# EAGLE board ESP32_LoRa PCBready (EAGLE 9.6.2)
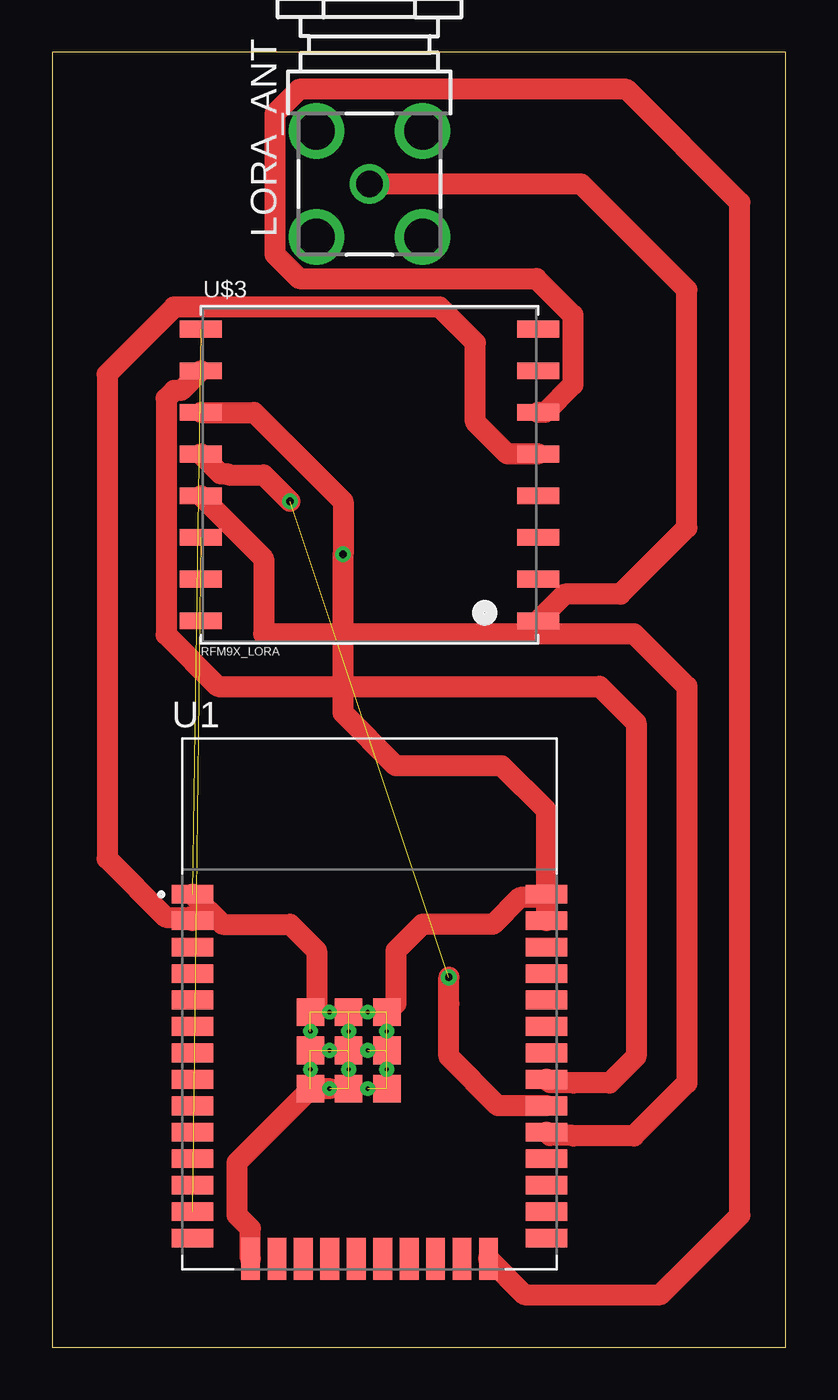
[diagram p0: board, top side]

Size 35.23 x 62.22 mm. Coordinates in mm from the lower left corner, seen from the top.
Outline: 0,0 35.23,0 35.23,62.22 0,62.22 0,0
Copper layers (1*16): Top 0.035mm / dielectric 1.5mm / Bottom 0.035mm
Design rules "default": minimum track width 6mil, minimum drill 0.35mm, track to track 6mil, track to pad 6mil, pad to pad 6mil, via to via 6mil, smd to smd 6mil, copper to edge 40mil, drill to drill 6mil, minimum pad ring 10mil, minimum via ring 8mil, stop-mask expansion 4mil, vias tented up to drill 0mil, thermal gap 10mil

## Footprints (pad centres in the part's own frame; a part is rotated, then mirrored left to right if it is on the bottom)
BU-SMA-G = drill 1.27: 1 0,0 | drill 1.778: 2 -2.55,2.55; 3 2.55,2.55; 4 2.55,-2.55; 5 -2.55,-2.55
MODULE_ESP32-WROOM-32 = smd 2 x 0.9: 1 -8.5,5.26; 2 -8.5,3.99; 3 -8.5,2.72; 4 -8.5,1.45; 5 -8.5,0.18; 6 -8.5,-1.09; 7 -8.5,-2.36; 8 -8.5,-3.63; 9 -8.5,-4.9; 10 -8.5,-6.17; 11 -8.5,-7.44; 12 -8.5,-8.71; 13 -8.5,-9.98; 14 -8.5,-11.25; 25 8.5,-11.25; 26 8.5,-9.98; 27 8.5,-8.71; 28 8.5,-7.44; 29 8.5,-6.17; 30 8.5,-4.9; 31 8.5,-3.63; 32 8.5,-2.36; 33 8.5,-1.09; 34 8.5,0.18; 35 8.5,1.45; 36 8.5,2.72; 37 8.5,3.99; 38 8.5,5.26 | smd 0.9 x 2: 15 -5.715,-12.25; 16 -4.445,-12.25; 17 -3.175,-12.25; 18 -1.905,-12.25; 19 -0.635,-12.25; 20 0.635,-12.25; 21 1.905,-12.25; 22 3.175,-12.25; 23 4.445,-12.25; 24 5.715,-12.25 | smd 1.33 x 1.33: 39_1 -2.835,-0.405; 39_2 -1,-0.405; 39_3 0.835,-0.405; 39_4 -2.835,-2.24; 39_5 -1,-2.24; 39_6 0.835,-2.24; 39_7 -2.835,-4.075; 39_8 -1,-4.075; 39_9 0.835,-4.075 | drill 0.2 pad 0.3: 39_10 -1.917,-0.405; 39_11 -0.083,-0.405; 39_12 -2.835,-1.323; 39_13 -1,-1.323; 39_14 0.835,-1.323; 39_15 -1.917,-2.24; 39_16 -0.083,-2.24; 39_17 -2.835,-3.158; 39_18 -1,-3.158; 39_19 0.835,-3.158; 39_20 -1.917,-4.075; 39_21 -0.083,-4.075
RFM9X_SMT = smd 2 x 0.8: 1P 8.1,-7; 2P 8.1,-5; 3P 8.1,-3; 4P 8.1,-1; 5P 8.1,1; 6P 8.1,3; 7P 8.1,5; 8P 8.1,7; 9P -8.1,7; 10P -8.1,5; 11P -8.1,3; 12P -8.1,1; 13P -8.1,-1; 14P -8.1,-3; 15P -8.1,-5; 16P -8.1,-7

## Placement (x,y rotation side)
LORA_ANT  BU-SMA-G  [BU-SMA-G]  15.24,55.88 90 top
U1  ESP32-WROOM-32  [MODULE_ESP32-WROOM-32]  15.24,16.51 0 top
U$3  RFM9X_LORA  [RFM9X_SMT]  15.24,41.91 0 top

## Library data of the parts
LORA_ANT = con-coax; OC_FARNELL: unknown; OC_NEWARK: unknown
U1 = ESP32-WROOM-32; AVAILABILITY: In Stock; DESCRIPTION: Bluetooth, WiFi 802.11b/g/n, Bluetooth v4.2 +EDR, Class 1, 2 and 3 Transceiver Module 2.4GHz ~ 2.5GHz Antenna Not Included, U.FL Surface Mount; MF: Espressif Systems; MP: ESP32-WROOM-32; PACKAGE: Module Espressif Systems; PRICE: None; PURCHASE-URL: https://pricing.snapeda.com/search/part/ESP32-WROOM-32/?ref=eda
U$3 = altro

## Nets
N$9: U1.2 U$3.5P
N$11: LORA_ANT.1 U$3.1P
N$13: U1.1 U1.15 U1.38 U1.39_1 U1.39_2 U1.39_3 U1.39_4 U1.39_5 U1.39_6 U1.39_7 U1.39_8 U1.39_9 U1.39_10 U1.39_11 U1.39_12 U1.39_13 U1.39_14 U1.39_15 U1.39_16 U1.39_17 U1.39_18 U1.39_19 U1.39_20 U1.39_21 U$3.9P
N$14: U1.24 U$3.6P
N$15: U1.13 U$3.14P
N$16: U1.29 U$3.13P
N$17: U1.30 U$3.12P
N$18: U1.37 U$3.11P
N$19: U1.31 U$3.10P

## Tracks (layer width: path | path; a pad name or v marks a point on that pad's centre or on a via)
N$9
  Top 1.016: U1.2 6.58,20.66 5.47,20.66 2.64,23.48 2.64,46.75 5.87,49.97 18.61,49.97 20.32,48.26 20.32,44.45 21.86,42.91 U$3.5P
N$11
  Top 1.016: U$3.1P 24.61,36.18 27.29,36.18 30.48,39.37 30.48,50.8 25.4,55.88 LORA_ANT.1
N$13  (21 unrouted)
  Top 1.016: U1.15 9.52,5.71 8.89,6.35 8.89,8.89 12.43,12.43 U1.39_20 | U1.1 8.19,20.32 11.43,20.32 12.7,19.05 12.7,16.4 U1.39_1 | U1.38 23.58,21.61 22.47,21.61 21.18,20.32 17.78,20.32 16.51,19.05 16.51,16.51 16.1,16.11 U1.39_3
N$14
  Top 1.016: U1.24 22.67,2.54 29.21,2.54 33.02,6.35 33.02,54.99 27.59,60.42 11.86,60.42 10.7,59.26 10.7,52.5 11.86,51.34 23.25,51.34 25,49.58 25,46.24 23.67,44.91 U$3.6P
N$15  (1 unrouted)
N$16
  Top 1.016: U$3.13P 10.16,37.89 10.16,34.29 27.94,34.29 30.48,31.75 30.48,12.7 27.94,10.16 25.03,10.16 25.01,10.18 23.9,10.18 U1.29
N$17  (via drill 0.35)  (1 unrouted)
  Top 1.016: U1.30 21.41,11.61 19.05,13.97 19.05,16.51 v19.05,17.78 | U$3.12P 8.08,41.97 8.41,41.97 8.47,41.91 10.16,41.91 v11.43,40.64
N$18  (via drill 0.35)
  Top 1.016: U$3.11P 9.7,44.91 13.97,40.64 v13.97,38.1 13.97,30.48 16.51,27.94 21.59,27.94 23.74,25.79 U1.37
N$19
  Top 1.016: U$3.10P 6.2,45.97 5.87,45.97 5.48,45.58 5.48,34.24 7.97,31.75 26.29,31.75 28.04,30 28.04,13.97 26.77,12.7 25.03,12.7 25.01,12.72 23.9,12.72 U1.31